# Altium PCB STM32F103.PcbDoc (part 5 of 5)
Units mil, origin at the board's own origin, x right, y up, seen from the top; angles counter-clockwise.
Board outline 3951 x 3526 mil, 2 copper layers (Top Layer, Bottom Layer); 148 components, 169 nets, 748 pads, 448 vias.
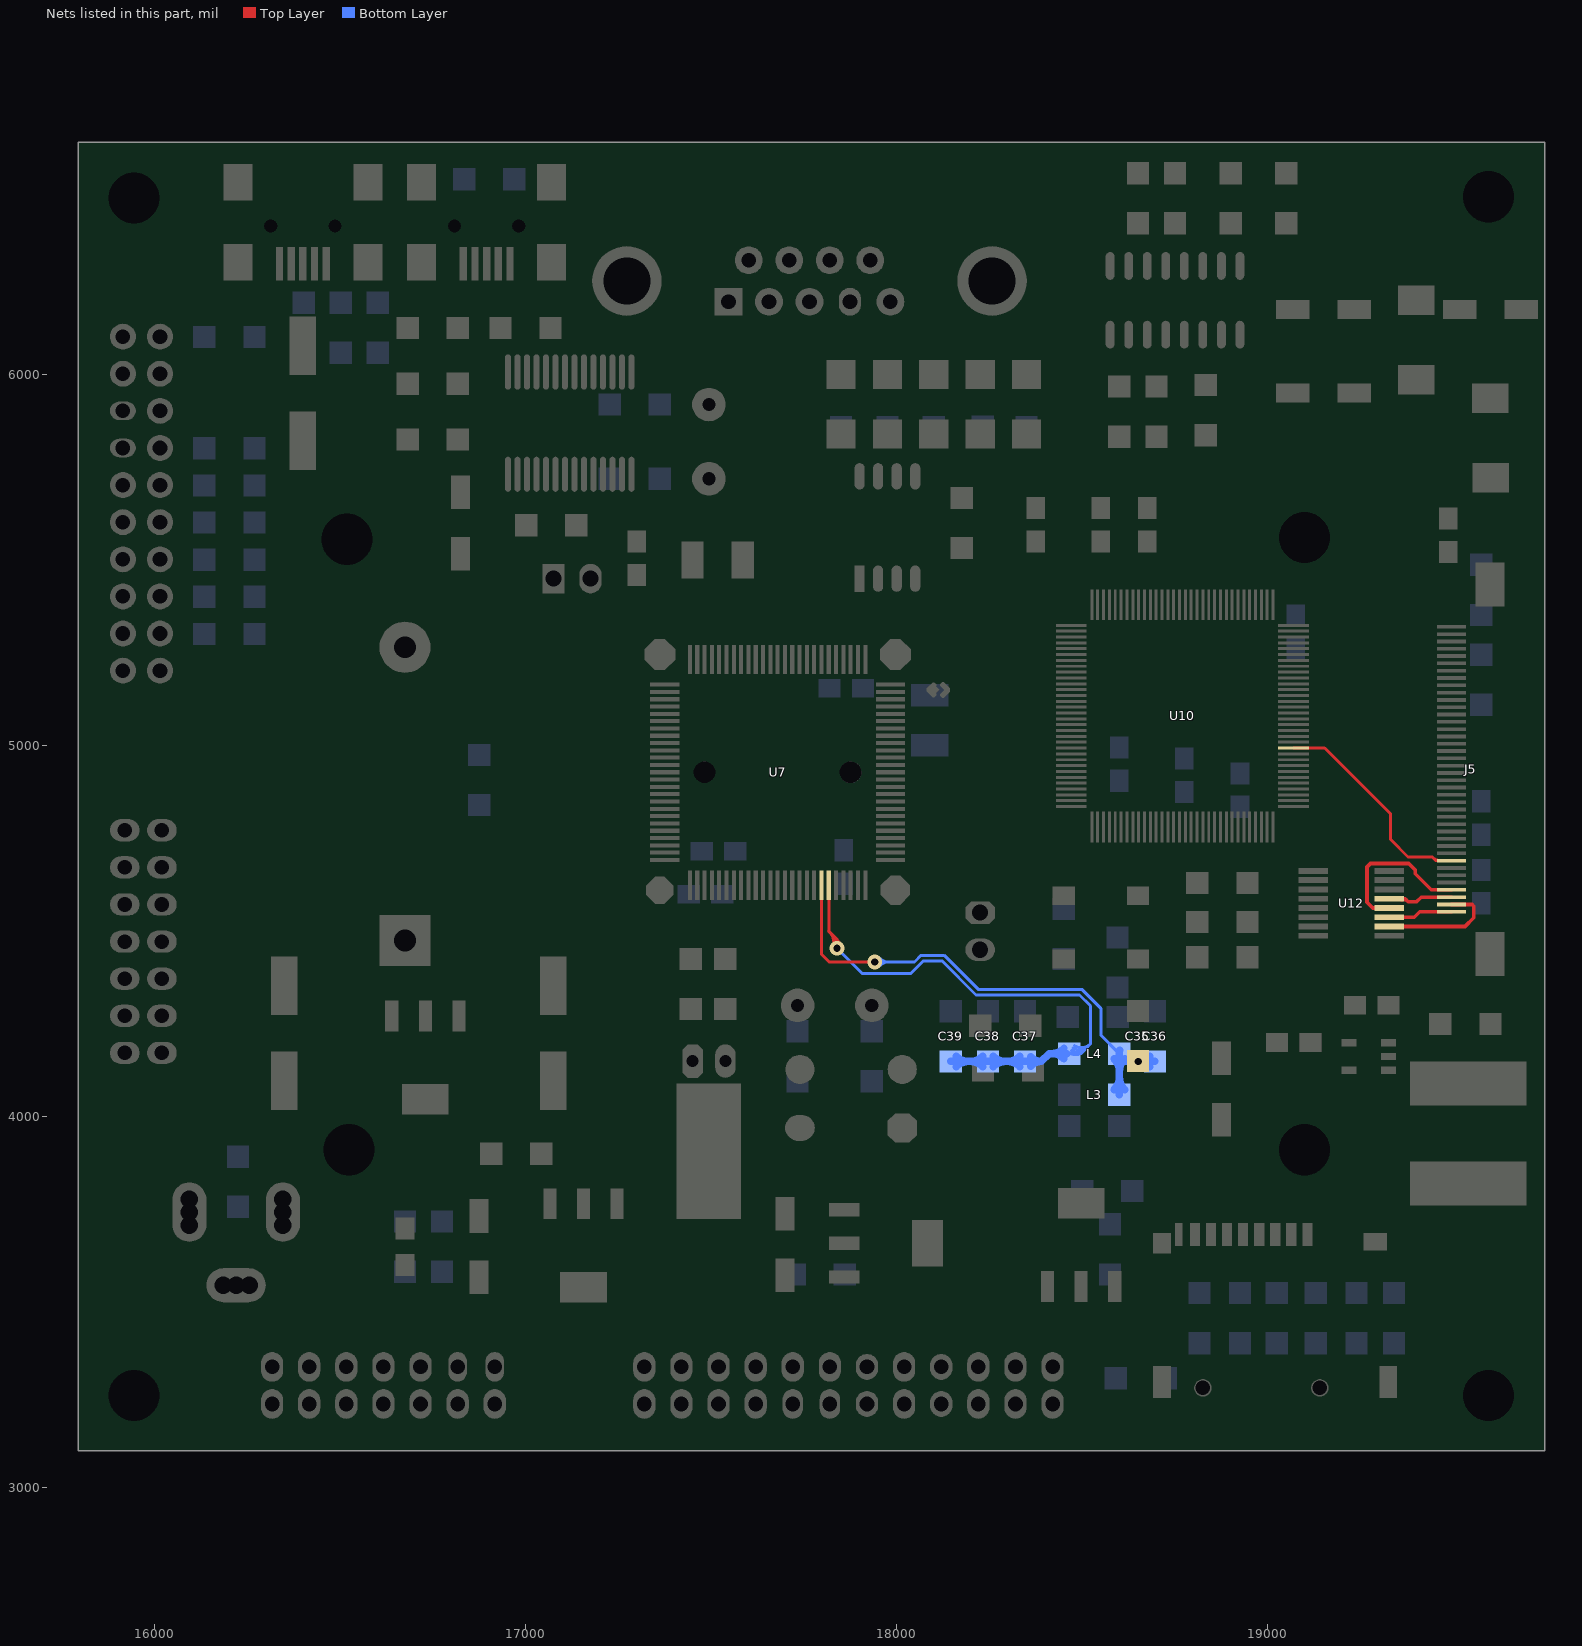
[diagram p5: the nets of this part, all layers, seen from the top]

## Via types
v1: diameter 40, hole 19.68, Top Layer to Bottom Layer, 402 vias
v2: diameter 35, hole 19.68, Top Layer to Bottom Layer, 21 vias
v3: diameter 50, hole 27.56, Top Layer to Bottom Layer, 19 vias
v4: diameter 40, hole 20, Top Layer to Bottom Layer, 6 vias

## Nets (pads, with @x,y where several pads share a name; then routed paths per layer and width w, separated by ;. In a path a pad name is that pad's centre, name@x,y a point inside that pad or via, vN(x,y) a via of type N, cw(c..) or ccw(c..) an arc to the next point about the centre after c; other vN are vias at no path point) (continued)
VREF-: C37.1 C38.1 C39.1 L4.2 U7.20 | length 2207.2
  Top Layer w8: 17816.18,4500.82 cw(c17778.66,4463.31) v1@17831.09,4455.22 ; U7.20@17817.02,4624 17817.02,4499.98 17839,4478 ; 17827.33,4489.67 cw(c17797.99,4460.33) v1(17839,4454) 17839,4478 ; v1@17832.85,4468.77 ccw(c17829,4478) 17839,4478 ; 17838.49,4478.51 cw(c17817.32,4457.34) v1@17846.91,4452.78 ; v1@17845.15,4468.77 cw(c17849,4478) 17839,4478
  Bottom Layer w8: v1(17839,4454) 17907,4386 18038,4386 18072,4420 18121.84,4420 18213.51,4328.33 18492.46,4328.33 18522,4298.79 18522,4196 ; L4.2@18458,4170 L4.2@18465,4170 18496,4170 18522,4196 ; L4.2@18466.1,4171.67 ccw(c18481.49,4194.94) 18501.21,4175.21 ; L4.2@18470.51,4178.34 ccw(c18487,4203.28) 18508.14,4182.14 ; L4.2@18474.93,4185.02 ccw(c18492.52,4211.63) 18515.07,4189.07 ; L4.2@18479.34,4191.69 ccw(c18498.03,4219.97) 18522,4196
  Bottom Layer w20: C39.1@18146,4149 C38.1@18246,4149 C37.1@18346,4149 18390,4149 ; C39.1@18160.14,4134.86 cw(c18194.28,4100.72) 18194.28,4149 cw(c18194.28,4197.28) C39.1@18160.14,4163.14 ; C38.1@18231.86,4134.86 ccw(c18197.72,4100.72) 18197.72,4149 ccw(c18197.72,4197.28) C38.1@18231.86,4163.14 ; C38.1@18260.14,4134.86 cw(c18294.28,4100.72) 18294.28,4149 cw(c18294.28,4197.28) C38.1@18260.14,4163.14 ; C37.1@18331.86,4134.86 ccw(c18297.72,4100.72) 18297.72,4149 ccw(c18297.72,4197.28) C37.1@18331.86,4163.14 ; C37.1@18361.07,4135.85 cw(c18390,4110.6) 18390,4149 ; C37.1@18361.07,4162.15 ccw(c18390,4187.4) 18390,4149 ; L4.2@18450.86,4155.86 ccw(c18416.72,4121.72) 18416.72,4170 ccw(c18416.72,4218.28) L4.2@18450.86,4184.14 ; L4.2@18458,4170 18411,4170 18390,4149
VSSA: C35.1 C36.1 L3.2 L4.1 U7.19 | length 1783.3
  Top Layer w8: U7.19@17797.33,4624 17797.33,4437.67 17818,4417 v1(17941,4417)
  Bottom Layer w8: v1(17941,4417) 18020,4417 ; v1@17952.31,4405.69 cw(c17979.63,4378.37) 17979.63,4417 cw(c17979.63,4455.63) v1@17952.31,4428.31 ; 17975,4417 18020,4417 ; L4.1@18600,4170 18550,4220 18550,4292 18498.67,4343.33 18219.73,4343.33 18128.05,4435 18065.79,4435 18047.79,4417 18020,4417
  Bottom Layer w20: L3.2@18585.86,4073.14 ccw(c18551.72,4107.28) 18600,4107.28 ccw(c18648.28,4107.28) L3.2@18614.14,4073.14 ; L4.1@18585.86,4155.86 cw(c18551.72,4121.72) 18600,4121.72 cw(c18648.28,4121.72) L4.1@18614.14,4155.86 ; L3.2@18600,4059 L4.1@18600,4147 ; L4.1@18601,4179 18600,4178 L4.1@18600,4170 L4.1@18600,4147 ; v1@18643.93,4141.93 ccw(c18626.86,4124.86) 18626.86,4149 ccw(c18626.86,4173.14) v1@18643.93,4156.07 ; v1@18658.07,4141.93 cw(c18675.14,4124.86) 18675.14,4149 cw(c18675.14,4173.14) v1@18658.07,4156.07 ; C36.1@18681.86,4134.86 ccw(c18647.72,4100.72) 18647.72,4149 ccw(c18647.72,4197.28) C36.1@18681.86,4163.14 ; C36.1@18696,4149 18602,4149 L4.1@18600,4147
  other v1: 18651,4149
VSYNC: J5.33 U10.43 | length 606.5
  Top Layer w8: U10.43@19069.21,4993.39 19153.13,4993.39 19331,4815.52 19331,4747 19378,4700 19443.31,4700 19453.23,4690.08 J5.33@19495,4690.08 ; 19447.01,4696.3 ccw(c19459.67,4708.96) J5.33@19460.58,4691.08
X+: J5.39 U12.2 | length 330.4
  Top Layer w10: U12.2@19327.36,4512.5 19531.5,4512.5 19555,4536 19555,4567 19550.03,4571.97 J5.39@19495,4571.97
X-: J5.37 U12.4 | length 429.1
  Top Layer w10: U12.4@19327.36,4562.5 19282.5,4562.5 19267,4578 19267,4673 19276.37,4682.37 19379.63,4682.37 19397,4665 19397,4654.75 19440.41,4611.34 J5.37@19495,4611.34
Y+: J5.40 U12.3 | length 173.8
  Top Layer w10: U12.3@19327.36,4537.5 19394.5,4537.5 19409.29,4552.29 J5.40@19495,4552.29
Y-: J5.38 U12.5 | length 193.2
  Top Layer w10: U12.5@19327.36,4587.5 19370,4587.5 19378.5,4579 19401,4579 19413.66,4591.66 J5.38@19495,4591.66 ; U12.5@19360.01,4584.87 cw(c19365.64,4572) 19375.57,4581.93
pads on no net: 1.1 2.1 3.1 4.1 5.1 6.1 7.1 8.1 CN13.0 CN13.sh1 CN13.sh3 CN13.sh4 J1.7 J1.8 J1.9 J1.MH1 J1.MH2 J2.1 J2.4 J2.6 J2.9 J3.7 J3.8 J3.9 J3.MH1 J3.MH2 J5.35 P1.17 U4.2 U4.3 U4.6 U4.8 U4.9 U4.10 U4.11 U4.12 U4.13 U4.14 U4.19 U4.24 U7.0 U10.24 U10.28 U10.29 U10.30 U10.31 U10.36 U10.37 U10.38 U10.50 U10.53 U10.85 U10.86 U10.87 U10.88 U10.89 U10.90 U10.91 U10.92 U10.98 U10.99 U12.7 U12.8 U12.13 X1.gnd

## Polygon pours and split planes (outlines as drawn)
GND on Top Layer "BottomLayer-No Net" (solid, remove dead copper, pour order 1000): 19823,3034.04 19814.96,3042.08 19814.96,6687 15717.04,6687 15709,6678.96 15749.19,6638.75 15749.19,3026
GND on Bottom Layer "BottomLayer-No Net" (solid, remove dead copper, pour order 1001): 19803,3091 19803,6663.82 19811,6671.69 19770.01,6712 15709,6712 15709,3146.06 15740.99,3114.6

## Keep-outs
Keep-Out Layer:
  the board outline again, w5

## Other copper
Bottom Layer:
  text "www.Naminic.com" at 18411,6525 h70

## Silkscreen, mask and mechanical layers (free items; w line width, h text height)
Top Overlay:
  drawing of 248 lines, arcs and shapes, not listed
  text "RESET" at 17753,3838 h60

## Text inside footprints (layer, text, board x,y; h text height)
J1: Mechanical 1 "PCB Edge" at 16558.91,6624.02 h9.84 r180
J2: Top Overlay "6" at 17581.73,6430.13 h40; Top Overlay "9" at 17908.9,6430.13 h40; Top Overlay "5" at 18057,6169 h40; Top Overlay "1" at 17450,6176 h40
J3: Mechanical 1 "PCB Edge" at 17053.91,6624.02 h9.84 r180
J5: Top Overlay "40" at 19445,4520 h40 r90; Top Overlay "1" at 19450,5310 h40 r90